# Altium PCB Operational_Amplifier.PcbDoc
Units mil, origin at the board's own origin, x right, y up, seen from the top; angles counter-clockwise.
Board outline 1165 x 1255 mil, 4 copper layers (Top Layer, Layer 1, Layer 2, Bottom Layer), stack 23.756 mil thick; 61 components, 59 nets, 168 pads, 37 vias.
Unrouted connection lines stored in the file: 39.
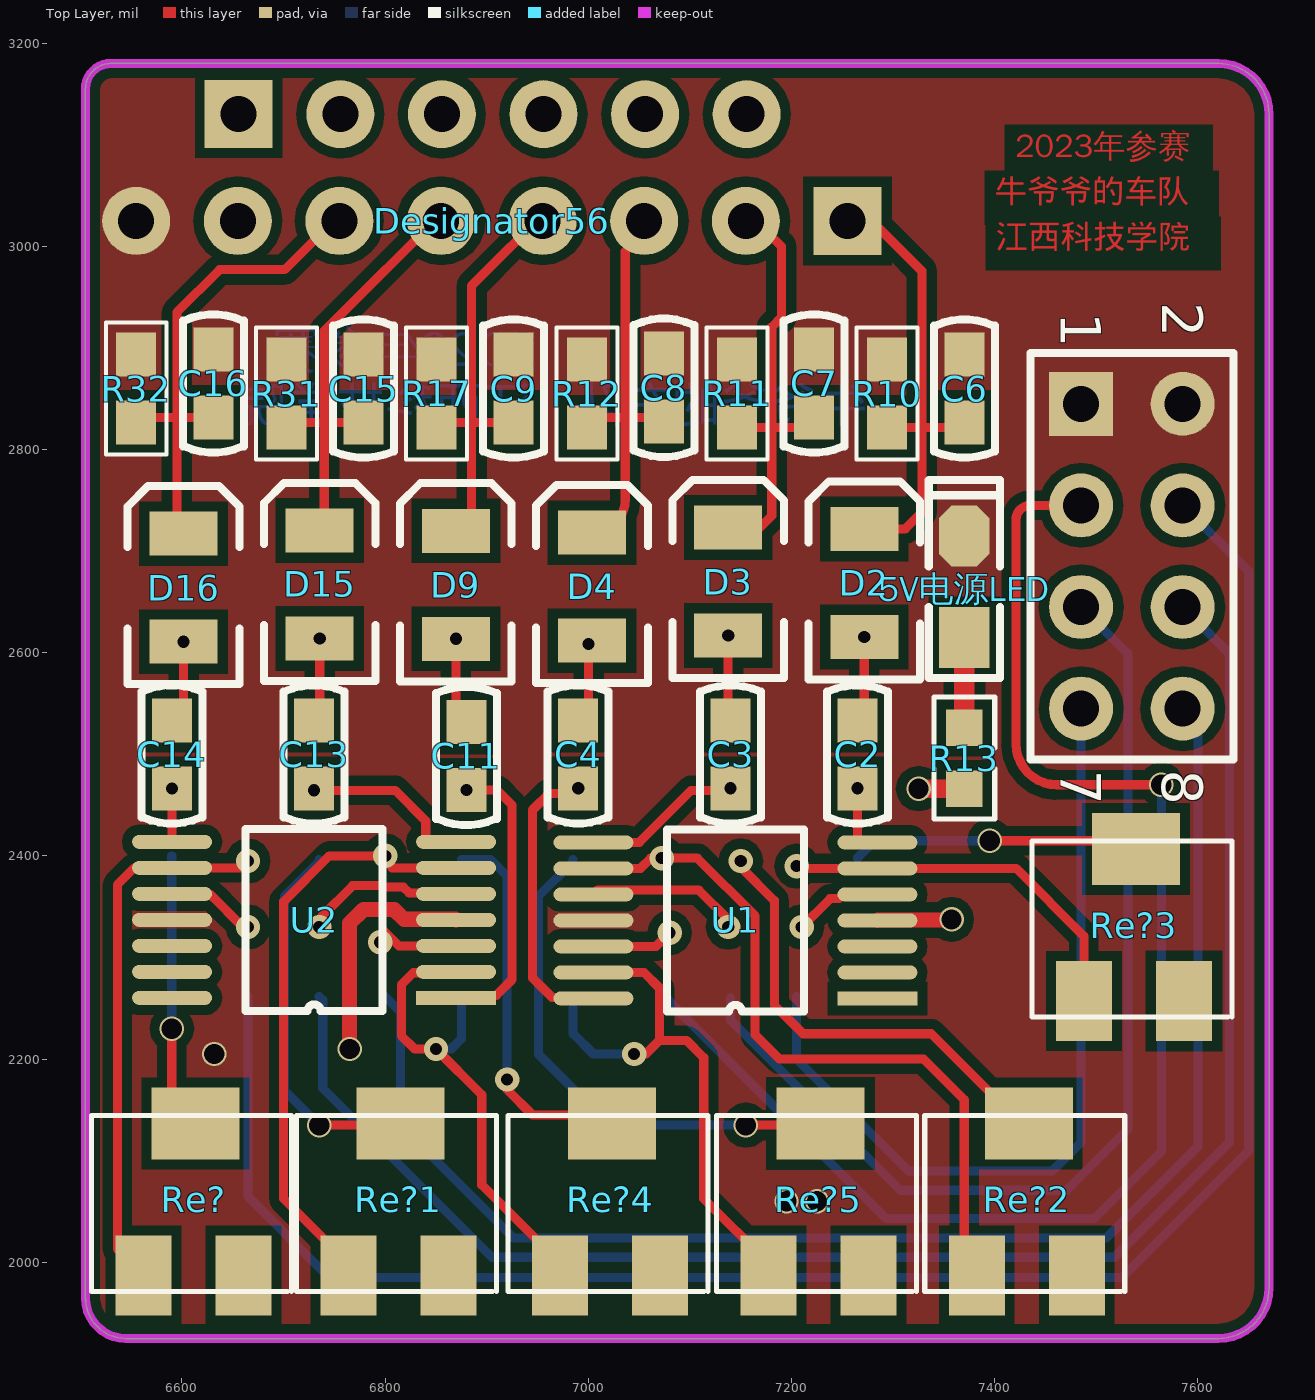
[diagram p0: Top Layer view]
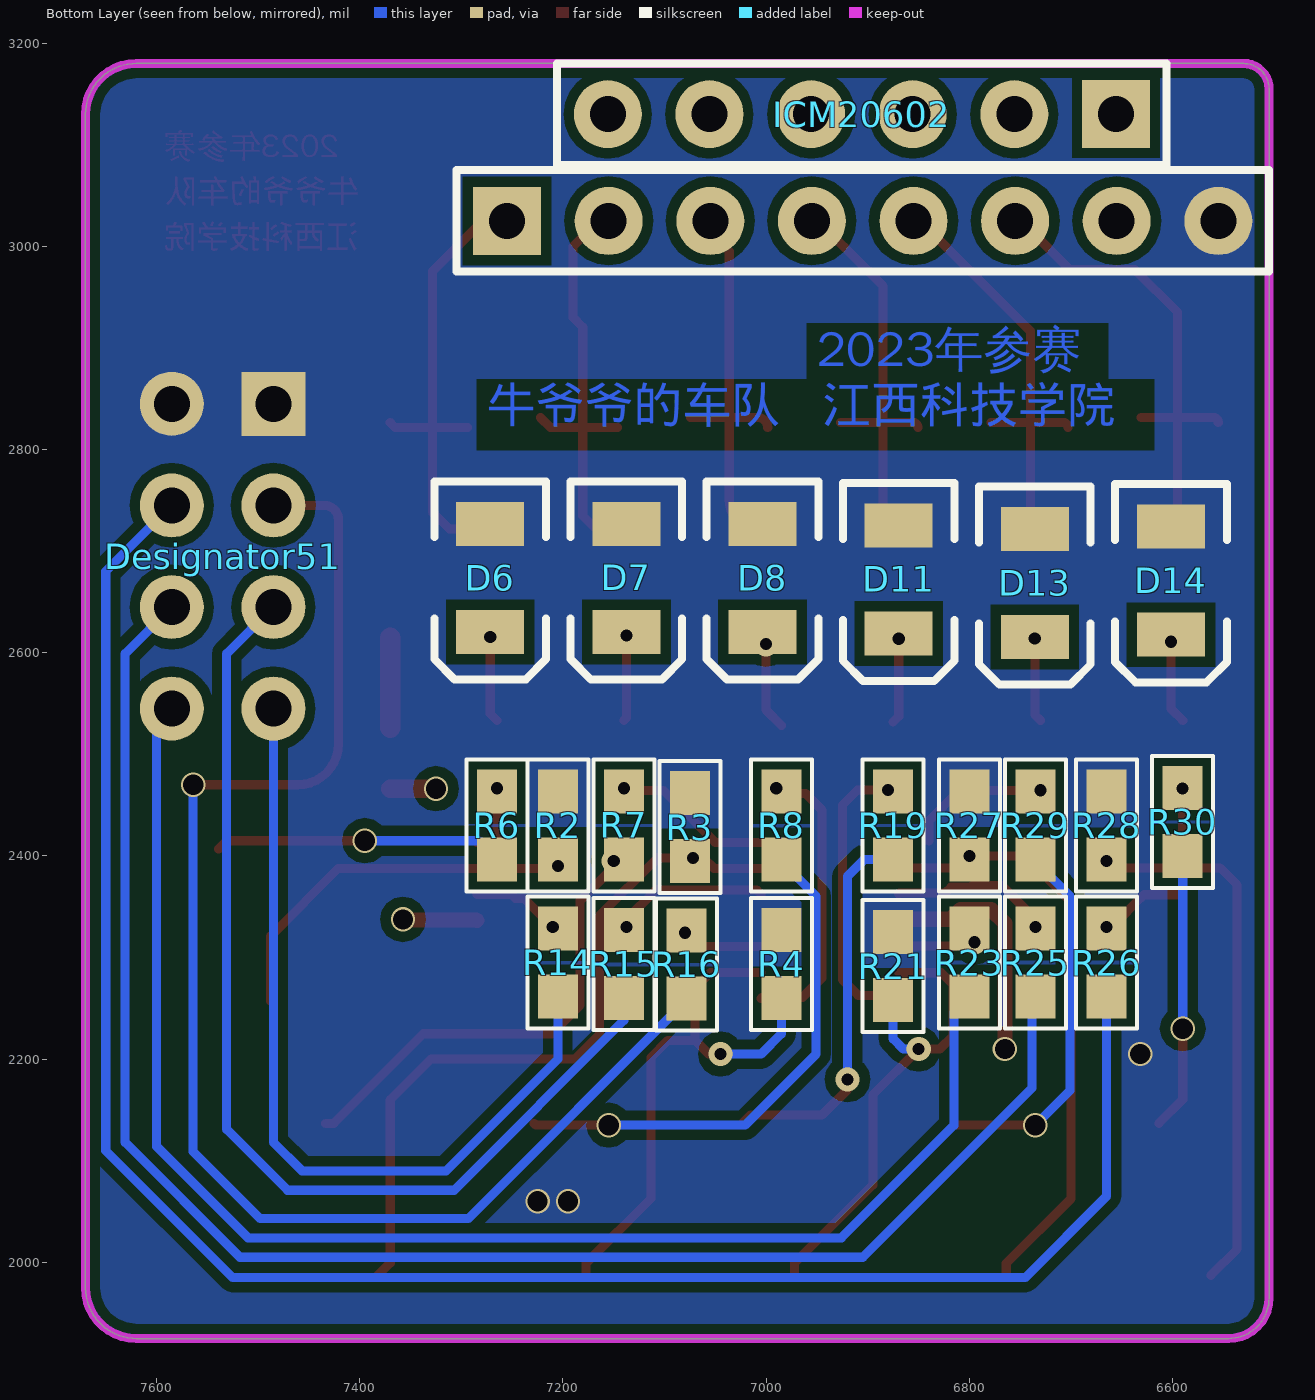
[diagram p1: Bottom Layer view, seen from below]
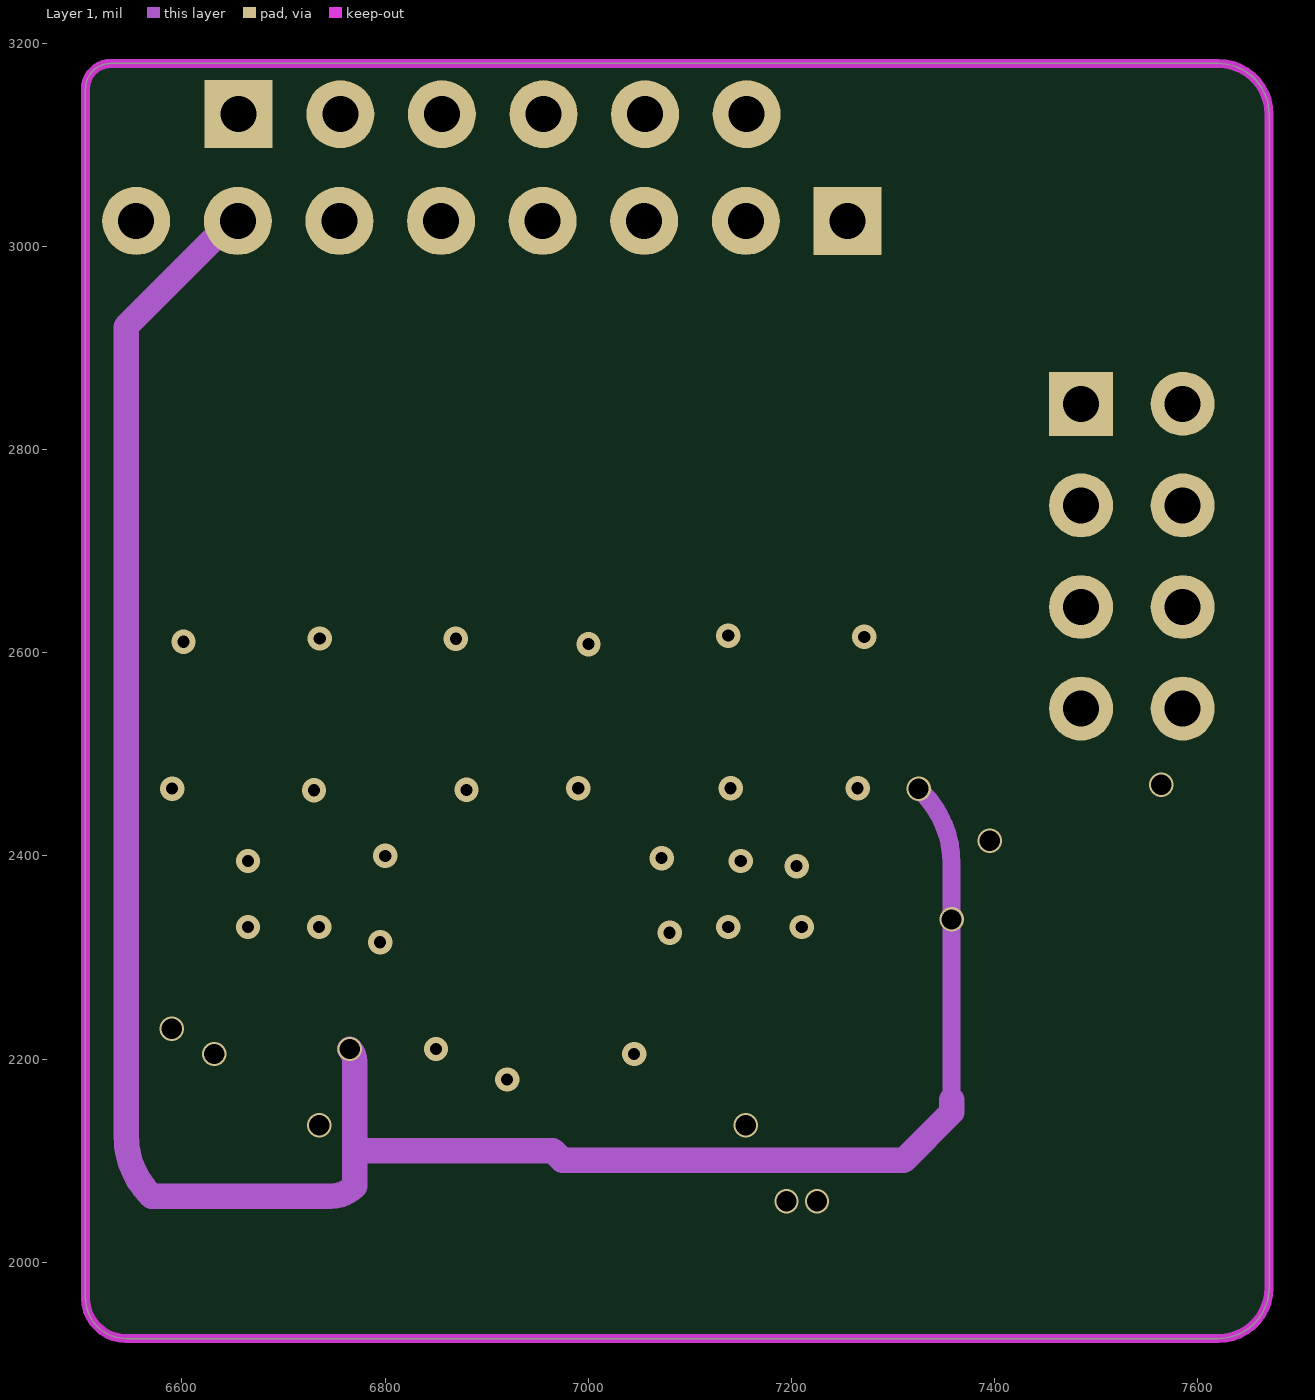
[diagram p2: Layer 1]
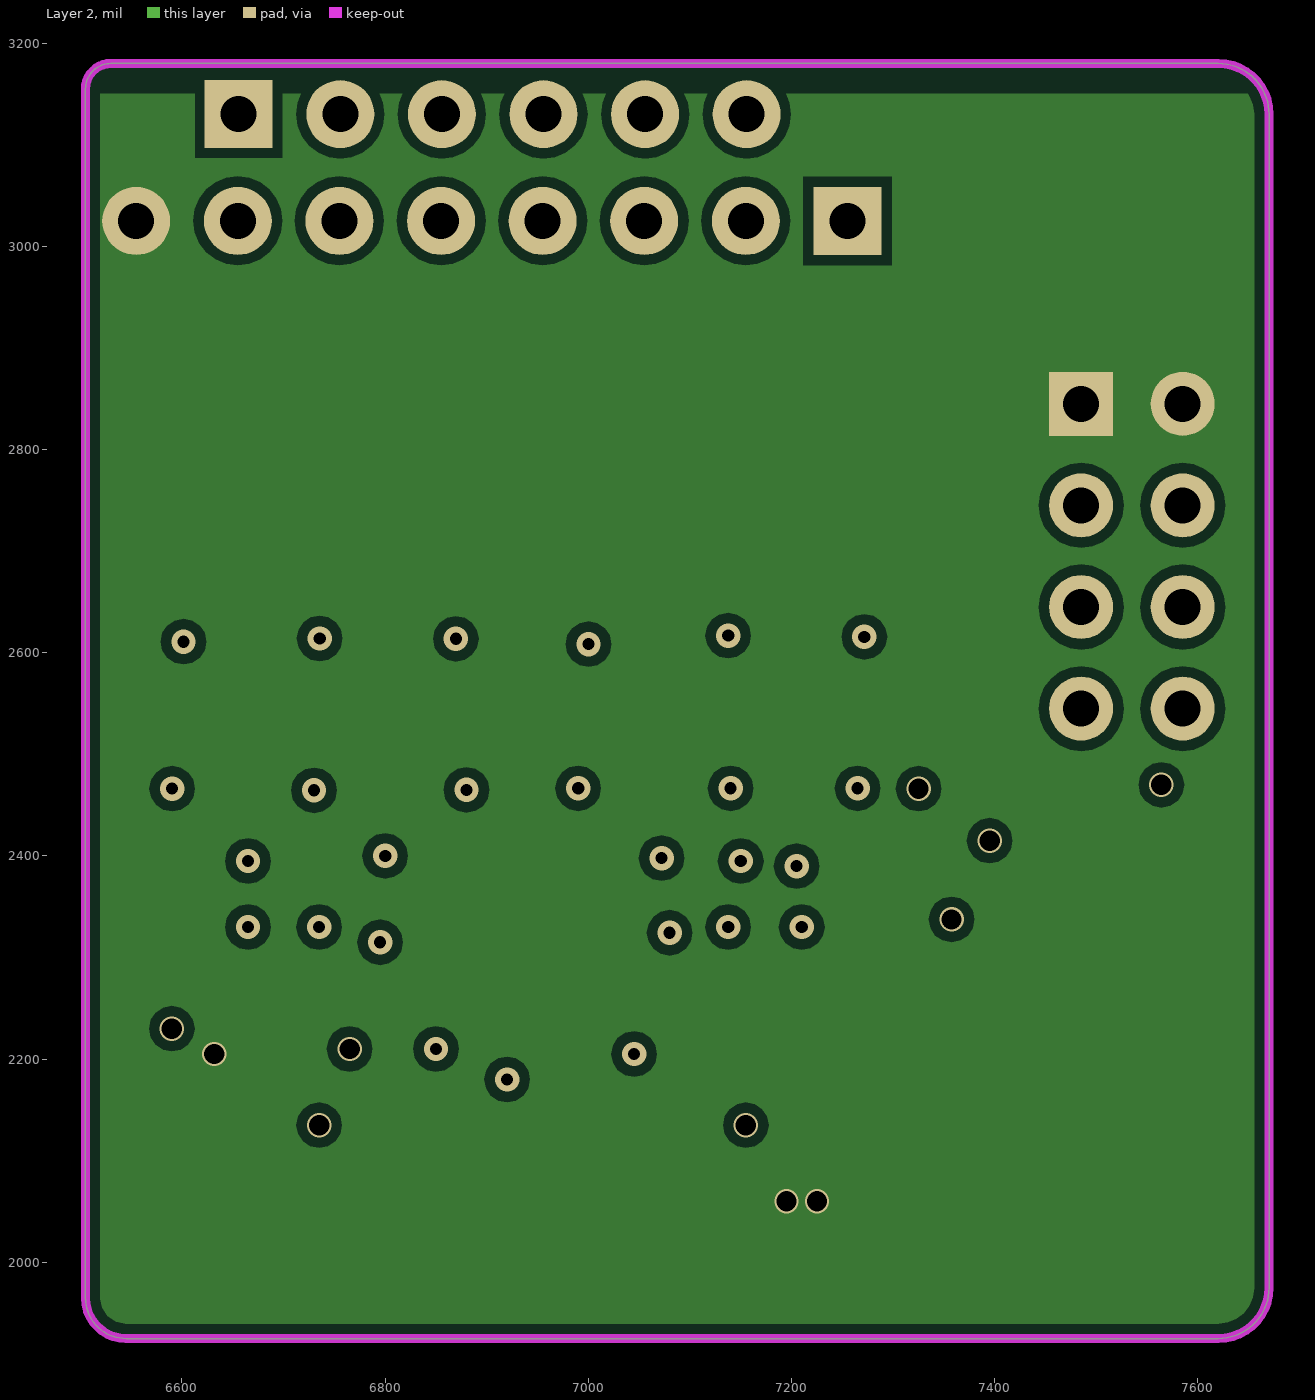
[diagram p3: Layer 2]

## Layer stack, top to bottom
Top Solder: solder mask 0.4, Solder Resist, Dk 3.5
Top Layer: signal copper 1.4
Dielectric 1: dielectric 12.6, FR-4, Dk 4.8
Layer 1: signal copper 1.3779
Dielectric 2: prepreg 2.8, PP-006, Dk 4.1
Layer 2: signal copper 1.3779
Dielectric 3: prepreg 2.8, PP-006, Dk 4.1
Bottom Layer: signal copper 1.4
Bottom Solder: solder mask 0.4, Solder Resist, Dk 3.5

## Board outline
6505,1965 6505,3155 cw(c6530,3155) 6530,3180 7620,3180 cw(c7620,3130) 7670,3130 7670,1975 cw(c7620,1975) 7620,1925 6545,1925 cw(c6545,1965)

## Design rules (kind name [scope] priority, off if disabled: settings)
Clearance [All] p1: gap=10 ignorepadtopadclearanceinfootprint=FALSE except(0: Arc-Hole Track-Hole SMDPad-Hole THPad-Hole Via-Hole Fill-Hole Poly-Hole Region-Hole Text-Hole)
ComponentClearance [All] p1: gap=6 collisioncheckmode=3 verticalgap=10 showdistances=FALSE
PolygonConnect [All] p1: connectstyle=Direct reliefconductorwidth=10 reliefentries=4 polygonreliefangle="90 Angle" airgapwidth=10
RoutingVias [All] p1: holewidth=28 width=50 viastyle="Through Hole" minholewidth=28 minwidth=50 maxholewidth=28 maxwidth=50
SolderMaskExpansion [All] p1: expansion=4
Width [All] p1: maxlimit=30 minlimit=8 preferedwidth=10
Width Width_1 [All] p2: maxlimit=9 minlimit=9 preferedwidth=9
29 further rules are at their usual default settings.

## Classes and differential pairs
net class NewClass: GND
component class Sheet1: C2 C3 C4 C6 C7 C8 C9 C11 C13 C14 C15 C16 D2 D3 D4 D6 D7 D8 D9 D11 D13 D14 D15 D16 R2 R3 R4 R6 R7 R8 R10 R11 R12 R14 R15 R16 R17 R19 R21 R23 R25 R26 R27 R28 R29 R30 R31 R32 U1 U2

## Components (designator, comment, footprint, x,y, rotation, side; value= is the part's Value field where it differs from the comment)
5V电源LED "LED5V" "LED 0805B" 7370,2665 r90 top
C2 "" C-RAD-0603 7265,2500 r90 top value=0.1uF
C3 "Cap" C-RAD-0603 7140,2500 r90 top value=0.1uF
C4 "" C-RAD-0603 6990,2500 r90 top value=0.1uF
C6 "Cap" C-RAD-0603 7370,2860 r270 top value=0.1uF
C7 "Cap" C-RAD-0603 7222.18,2865 r270 top value=0.1uF
C8 "Cap" C-RAD-0603 7074.35,2860.8 r270 top value=0.1uF
C9 "Cap" C-RAD-0603 6926.53,2860 r270 top value=0.1uF
C11 "Cap" C-RAD-0603 6880,2498.46 r90 top value=0.1uF
C13 "" C-RAD-0603 6730,2500 r90 top value=0.1uF
C14 "Cap" C-RAD-0603 6590,2500 r90 top value=0.1uF
C15 "Cap" C-RAD-0603 6778.7,2860 r270 top value=0.1uF
C16 "Cap" C-RAD-0603 6630.88,2865 r270 top value=0.1uF
D2 "1N5819" SOD-123 7271.61,2668.7 r270 top
D3 "1N5819" SOD-123 7137.6,2670 r270 top
D4 "1N5819" SOD-123 7003.59,2665 r270 top
D6 "1N5819" SOD-123 7271.61,2673.7 r90 bottom
D7 "1N5819" SOD-123 7137.6,2673.7 r90 bottom
D8 "1N5819" SOD-123 7003.59,2673.7 r90 bottom
D9 "1N5819" SOD-123 6869.57,2666.85 r270 top
D11 "1N5819" SOD-123 6869.57,2672.16 r90 bottom
D13 "1N5819" SOD-123 6735.56,2668.7 r90 bottom
D14 "1N5819" SOD-123 6601.55,2670.86 r90 bottom
D15 "1N5819" SOD-123 6735.56,2667.16 r270 top
D16 "1N5819" SOD-123 6601.55,2664.02 r270 top
Designator51 "Comment" HDR2.54-LI-2x4P 7535,2695 r270 bottom
Designator56 "Comment" HDR2.54-LI-8P 6905,3025 r180 top
ICM20602 "Header 6" HDR2.54-LI-6P 6905.81,3130 r0 bottom
R2 "4.7K" 0603-1 7205,2430 r270 bottom
R3 "4.7K" 0603-1 7075,2428.46 r270 bottom
R4 "4.7K" 0603-1 6985,2293.46 r270 bottom
R6 "4.7K" 0603-1 7265,2430 r90 bottom
R7 "4.7K" 0603-1 7140,2430 r90 bottom
R8 "4.7K" 0603-1 6985,2430 r90 bottom
R10 "4.7K" 0603-1 7294.12,2855 r270 top
R11 "4.7K" 0603-1 7146.3,2855 r90 top
R12 "4.7K" 0603-1 6998.47,2855 r90 top
R13 "Res1" R-0603 7370,2496.22 r270 top value=1K (schematic designator R10)
R14 "4.7K" 0603-1 7205,2295 r90 bottom
R15 "4.7K" 0603-1 7140,2293.46 r90 bottom
R16 "4.7K" 0603-1 7078.39,2293.23 r90 bottom
R17 "4.7K" 0603-1 6850.65,2855 r270 top
R19 "4.7K" 0603-1 6875,2430 r90 bottom
R21 "4.7K" 0603-1 6875,2291.54 r270 bottom
R23 "4.7K" 0603-1 6800,2295 r90 bottom
R25 "4.7K" 0603-1 6735,2295 r90 bottom
R26 "4.7K" 0603-1 6665,2295 r90 bottom
R27 "4.7K" 0603-1 6800,2430 r270 bottom
R28 "4.7K" 0603-1 6665,2430 r270 bottom
R29 "4.7K" 0603-1 6735,2430 r90 bottom
R30 "4.7K" 0603-1 6590,2433.46 r90 bottom
R31 "4.7K" 0603-1 6702.82,2855 r270 top
R32 "4.7K" 0603-1 6555,2860 r90 top
Re? "3224W" 3224W 6609.53,2060 r90 top
Re?1 "3224W" 3224W 6810.97,2060 r90 top (schematic designator Re?)
Re?2 "3224W" 3224W 7429.53,2060 r90 top (schematic designator Re?)
Re?3 "3224W" 3224W 7535,2330 r90 top (schematic designator Re?)
Re?4 "3224W" 3224W 7019.53,2060 r90 top (schematic designator Re?)
Re?5 "3224W" 3224W 7224.53,2060 r90 top (schematic designator Re?)
U1 "OPA4377" OPA4377 7274.68,2279.45 r180 top locked
U2 "OPA4377" OPA4377 6860,2280 r180 top locked

## Footprints (in the part's own frame and the unit in brackets; to place one, negate y for a bottom-side part, rotate by r counter-clockwise, add the part's x,y. Pads: shape width x height; smd on the part's side, far side on the other; paste and mask are expansions set on the pad)
0603-1 [mm] "贴片带丝印"
  rect 1.1x1 smd: 1(-0.85,0) 2(0.85,0)
  silkscreen extent -1.65,-0.76 1.65,0.76, body extent -1.14,-0.38 1.14,0.38, height 1
3224W [mm]
  rect 2x1.4 smd: 1(-1.85,1.2) 3(-1.85,-1.3)
  rect 1.8x2.2 smd: 2(1.95,-0.1)
  silkscreen extent -2.25,-2.5 2.15,2.5
C-RAD-0603 [mm] "贴片电容"
  rect 1.1x1 smd: 1(-0.85,0) 2(0.85,0)
  silkscreen extent -1.73,-0.76 1.73,0.76, body extent -1.14,-0.38 1.14,0.38, height 1
HDR2.54-LI-2x4P [mm] "双排排针，4x2脚"
  rect 1.6x1.6 hole 0.9: 1(-3.81,1.27)
  round 1.6 hole 0.9: 2(-3.81,-1.27) 3(-1.27,1.27) 4(-1.27,-1.27) 5(1.27,1.27) 6(1.27,-1.27) 7(3.81,1.27) 8(3.81,-1.27)
  body extent -5.08,-2.54 5.08,2.54, height 8.5
HDR2.54-LI-6P [mm] "排针，6脚"
  rect 1.7x1.7 hole 0.9: 1(-6.35,0)
  round 1.7 hole 0.9: 2(-3.81,0) 3(-1.27,0) 4(1.27,0) 5(3.81,0) 6(6.35,0)
  silkscreen extent -7.62,-1.27 7.62,1.27, body extent -7.62,-1.27 7.62,1.27, height 8.5
HDR2.54-LI-8P [mm] "排针，8脚"
  rect 1.7x1.7 hole 0.9: 1(-8.89,0)
  round 1.7 hole 0.9: 2(-6.35,0) 3(-3.81,0) 4(-1.27,0) 5(1.27,0) 6(3.81,0) 7(6.35,0) 8(8.89,0)
  body extent -10.16,-1.27 10.16,1.27, height 8.5
"LED 0805B" [mil] "蓝色0805LED                                    淘宝ID:黄晶宝石"
  rect 60x50 smd: 1(-50,0)
  oct 60x50 smd: 2(50,0)
  silkscreen extent -90,-35 105,35, body extent -39,-25 39,25, height 32
OPA4377 [mm]
  rect 2x0.35 smd: 1(-0.25,0.5)
  oval 2x0.35 smd: 2(-0.25,-0.15) 3(-0.25,-0.8) 4(-0.25,-1.45) 5(-0.25,-2.1) 6(-0.25,-2.75) 7(-0.25,-3.4) 8(6.85,-3.4) 9(6.85,-2.75) 10(6.85,-2.1) 11(6.85,-1.45) 12(6.85,-0.8) 13(6.85,-0.15) 14(6.85,0.5)
  silkscreen extent 1.58,-3.72 5.01,0.83
R-0603 [mil]
  rect 36x36 smd: 1(-30,0) 2(30,0)
  silkscreen extent -60,-30 60,30, body extent -31,-16 31,16, height 18
SOD-123 [mm] "Surface mounted, 2 pin package"
  rect 1.1x1.7 smd: 1(1.35,0) 2(-1.35,0)
  silkscreen extent -2.54,-1.4 2.41,1.4, body extent -1.65,-0.8 1.65,0.8, height 1.2

## Part data
5V电源LED: library part LED2, "Typical RED, GREEN, YELLOW, AMBER GaAs LED", LatestRevisionDate=17-Jul-2002, LatestRevisionNote="Re-released for DXP Platform.", PackageDescription="SM LED; 2 Flat Leads", PackageReference=3.2X1.6X1.1, PackageVersion=Feb-2002, Published=8-Jun-2000, Publisher="Altium Limited"
C2 C4 C13: library part Cap, "Capacitor", LatestRevisionDate=17-Jul-2002, LatestRevisionNote="Re-released for DXP Platform.", PackageDescription="Radial Cap, Thru-Hole; 2 Leads; 0.3 in Pin Spacing", PackageReference=RAD-0.3, Published=8-Jun-2000, Publisher="Altium Limited"
C3 C6 C7 C8 C9 C11 C14 C15 C16: "Capacitor", LatestRevisionDate=17-Jul-2002, LatestRevisionNote="Re-released for DXP Platform.", PackageDescription="Radial Cap, Thru-Hole; 2 Leads; 0.3 in Pin Spacing", PackageReference=RAD-0.3, Published=8-Jun-2000, Publisher="Altium Limited"
D2 D3 D4 D6 D7 D8 D9 D11 D13 D14 D15 D16: library part "Diode 1N5404", "3 Amp General Purpose Rectifier", ComponentLink1Description="Manufacturer Link", ComponentLink1URL=http://www.fairchildsemi.com/, ComponentLink2Description=Datasheet, ComponentLink2URL=http://www.fairchildsemi.com/ds/1N%2F1N5400.pdf, DatasheetVersion=1998, LatestRevisionDate=17-Jul-2002, LatestRevisionNote="Re-released for DXP Platform.", PackageDescription="Diode, Axial; Body 9.5 x 5.6 mm (LxDia. max), Lead Dia. 1.32 mm (max)", PackageReference=DO-201AD, PackageVersion=Aug-1999, Published=8-Jun-2000, Publisher="Altium Limited"
ICM20602: "Header, 6-Pin", LatestRevisionDate=17-Jul-2002, LatestRevisionNote="Re-released for DXP Platform.", Publisher="Altium Limited"
R2 R3 R4 R6 R7 R8 R10 R11 R12 R14 R15 R16 R17 R19 R21 R23 R25 R26 R27 R28 R29 R30 R31 R32: library part RES
R13: "Resistor", LatestRevisionDate=17-Jul-2002, LatestRevisionNote="Re-released for DXP Platform.", PackageDescription="Axial Device, Thru-Hole; 2 Leads; 0.3 in Pin Spacing", PackageReference=AXIAL-0.3, Published=8-Jun-2000, Publisher="Altium Limited"
U1 U2: library part OPA4377_1, Contributor=sssssxw, spicePre=U, spiceSymbolName=OPA4377

## Via types
v1: diameter 24, hole 12, Top Layer to Bottom Layer, tented both sides, 26 vias
v2: diameter 24, hole 20, Top Layer to Bottom Layer, tented both sides, 11 vias

## Nets (pads, with @x,y where several pads share a name; then routed paths per layer and width w, separated by ;. In a path a pad name is that pad's centre, name@x,y a point inside that pad or via, vN(x,y) a via of type N, cw(c..) or ccw(c..) an arc to the next point about the centre after c; other vN are vias at no path point)
3.3V: 
GND: 5V电源LED.2 C6.1 C7.1 C8.1 C9.1 C15.1 C16.1 D6.1 D7.1 D8.1 D11.1 D13.1 D14.1 Designator51.1 Designator51.2 Designator56.8 R2.1 R3.1 R4.1 R10.1 R11.2 R12.2 R17.1 R21.1 R27.1 R28.1 R31.1 R32.2 U1.11 U2.11
  other v2: 7195,2060 7225,2060 6631.66,2205
IN1: 
IN2: Designator51.7 R14.1 | length 839.8
  Bottom Layer w9: R14.1 7205,2200 7315,2090 7456.87,2090 7485,2118.13 Designator51.7 Designator51.7@7475,2535
IN3: Designator51.5 R15.1 | length 1068.9
  Top Layer w9: Designator51.5 7491.27,2638.73 Designator51.5@7511.27,2638.73
  Bottom Layer w9: R15.1 7140,2238.13 7307.13,2071 7471,2071 7531,2131 7531,2599 Designator51.5
IN4: Designator51.3 R16.1 | length 1422.4
  Top Layer w9: Designator51.3 7435,2745 ccw(c7435,2731) 7421,2731 7421,2510 ccw(c7461,2510) 7461,2470 v2(7564,2470)
  Bottom Layer w9: R16.1 7078.39,2257.8 7293.19,2043 7498,2043 7564,2109 7564,2460.22 v2@7570,2466.22
IN5: Designator51.8 R23.1 | length 1438.2
  Bottom Layer w9: R23.1 6815.19,2246.35 6815.19,2134.82 6926,2024 7510,2024 7600,2114 7600,2530 Designator51.8
IN6: Designator51.6 R25.1 | length 1645.7
  Bottom Layer w9: R25.1 6738.5,2258.04 6738.5,2171.5 6905,2005 7517.87,2005 7631,2118.13 7631,2599 Designator51.6
IN7: Designator51.4 R26.1 | length 1928.4
  Bottom Layer w9: R26.1 6665,2065 6745,1985 7525,1985 7650,2110 7650,2680 Designator51.4
IN8: 
NetC1_1: U1.1
NetC1_2: 
NetC2_1: C2.1 R6.2 U1.7 | length 72.8
  Top Layer w9: v1(7265,2466.54) 7265,2413.31 U1.7
NetC2_2: C2.2 D2.1 D6.2 | length 84.8
  Top Layer w9: C2.2 7271.61,2540.07 v1(7271.61,2615.55)
NetC3_1: C3.1 R7.2 U1.8 | length 158.2
  Top Layer w9: U1.8 7050.05,2413.31 7101.31,2464.57 7140,2464.57 v1(7140,2466.54)
NetC3_2: C3.2 D3.1 D7.2 | length 84.4
  Top Layer w9: v1(7137.6,2616.85) 7137.6,2535.87 C3.2
NetC4_1: C4.1 R8.2 U1.14 | length 280.4
  Top Layer w9: C4.1@6985,2461.54 6961.31,2461.54 6945,2445.22 6945,2280 6964.32,2260.68 7004.09,2260.68 U1.14
  other v1: 6990,2466.54
NetC4_2: C4.2 D4.1 D8.2 | length 91.1
  Top Layer w9: C4.2@6985,2528.46 7000.19,2543.65 v1(7000.19,2608.45) D4.1
NetC11_1: C11.1 R19.2 U2.1 | length 290.5
  Top Layer w9: U2.1 6872.23,2262.7 6909.37,2262.7 6925,2278.33 6925,2450 6910,2465 C11.1@6875,2465
  other v1: 6880,2465
NetC11_2: C11.2 D9.1 D11.2 | length 84
  Top Layer w9: v1(6869.57,2613.7) 6869.57,2537.35 C11.2@6875,2531.93
NetC12_1: U2.14
NetC12_2: 
NetC13_1: C13.1 R29.2 U2.7 | length 143.9
  Top Layer w9: C13.1 v1(6730,2464.57) 6809.81,2464.57 6840,2434.38 U2.7@6840,2415
NetC13_2: C13.2 D13.2 D15.1 | length 82.9
  Top Layer w9: C13.2 6735.56,2539.03 v1(6735.56,2614.01)
NetC14_1: C14.1 R30.2 U2.8 | length 52.8
  Top Layer w9: C14.1 v1(6590.32,2466.22) U2.8
NetC14_2: C14.2 D14.2 D16.1 | length 82.2
  Top Layer w9: C14.2 6601.55,2545.02 v1(6601.55,2610.87)
NetR1_2: U1.2
NetR2_2: R2.2 Re?3.1 U1.6 | length 377.2
  Top Layer w9: v1@7205,2395 7212.28,2387.72 7421,2387.72 7487.76,2320.96 Re?3.1
  other v1: 7205,2390
NetR3_2: R3.2 Re?2.1 U1.9 | length 714.1
  Top Layer w9: U1.9 7051.33,2387.72 7061.46,2397.85 v1(7072.07,2397.85) 7107.23,2397.85 7164.1,2340.98 7164.1,2224.1 7188.2,2200 7330,2200 7370,2160 7370,1999.45 Re?2.1
NetR4_2: R4.2 Re?5.1 U1.13 | length 548
  Top Layer w9: U1.13 7054.64,2285.36 7070,2270 7070,2218.41 ; v1(7045,2205) 7056.59,2205 7070,2218.41 ; Re?5.1 7177.28,1998.98 7113.5,2062.76 7113.5,2201.5 7096.59,2218.41 7070,2218.41
  Bottom Layer w9: R4.2 6985,2225 7005,2205 v1(7045,2205)
NetR5_1: 
NetR6_1: R6.1 Re?3.2 | length 286.1
  Top Layer w9: v2(7395,2415) 7530.71,2415 Re?3.2
  Bottom Layer w9: R6.1 7265,2398.5 7280.19,2413.69 7282.15,2413.69 7283.46,2415 v2(7395,2415)
NetR7_1: R7.1 Re?2.2 | length 454.1
  Top Layer w9: v1(7150,2395) 7150,2389.06 7183.1,2355.96 7183.1,2253.18 7211.27,2225 7337.36,2225 7425.59,2136.77 Re?2.2
NetR8_1: R8.1 Re?5.2 | length 513.1
  Top Layer w9: v2(7155,2135) 7226.7,2135 Re?5.2
  Bottom Layer w9: R8.1 6985,2394.57 6950.81,2360.38 6950.81,2205 7020.81,2135 v2(7155,2135)
NetR13_2: U1.3
NetR14_2: R14.2 U1.5 | length 87.8
  Top Layer w9: v1(7210,2330) 7237.93,2357.93 7246.55,2357.93 7250.75,2362.13 U1.5
NetR15_2: R15.2 U1.10 | length 153.7
  Top Layer w9: U1.10 7009.2,2366.33 7108.67,2366.33 7137.6,2337.4 v1(7137.6,2330)
NetR16_2: R16.2 U1.12 | length 80.6
  Top Layer w9: U1.12 7066.59,2310.95 v1(7080,2324.36)
NetR19_1: R19.1 Re?4.2 | length 379.1
  Top Layer w9: v1(6920,2180) 6920,2170 6945,2145 7015.23,2145 Re?4.2
  Bottom Layer w9: R19.1 6903.46,2396.54 6920,2380 v1(6920,2180)
NetR20_1: 
NetR21_2: R21.2 Re?4.1 U2.2 | length 489.4
  Top Layer w9: U2.2 6868.93,2284.99 6827.75,2284.99 6815.97,2273.21 6815.97,2223.12 6829.1,2210 v1(6850,2210) 6895,2165 6895,2076.26 6972.28,1998.98 Re?4.1
  Bottom Layer w9: v1(6850,2210) 6865,2210 6875,2220 R21.2
NetR22_2: U2.13
NetR23_2: R23.2 U2.3 | length 75.4
  Top Layer w9: v1@6800,2325 6813.51,2311.49 U2.3
  other v1: 6795,2315
NetR24_2: U2.12
NetR25_2: R25.2 U2.5 | length 159.7
  Top Layer w9: v1(6735,2330) 6737.87,2332.87 6737.87,2340.7 6767.94,2370.77 6797.36,2370.77 6798.86,2369.27 6817.96,2369.27 6823.63,2363.59 6868.93,2363.59 U2.5
NetR26_2: R26.2 U2.10 | length 90.4
  Top Layer w9: U2.10 6591.23,2361.76 6628.24,2361.76 6631.53,2358.47 6631.66,2358.47 6644.19,2345.94 6644.19,2345.81 v1@6665,2325
  other v1: 6665,2330
NetR27_2: R27.2 Re?1.1 U2.6 | length 590.5
  Top Layer w9: Re?1.1 6763.73,1998.98 6700,2062.71 6700,2355 6745,2400 v1(6800,2400) 6800,2395.94 6806.73,2389.21 6806.73,2388.27 U2.6
NetR28_2: R28.2 Re?.1 U2.9 | length 533.3
  Top Layer w9: Re?.1 6536.45,2013.01 6536.45,2371.54 6553.18,2388.27 U2.9 6658.27,2388.27 v1(6665,2395)
NetR29_1: R29.1 Re?1.2 | length 370.5
  Top Layer w9: v2(6735,2135) 6813.14,2135 Re?1.2
  Bottom Layer w9: v2(6735,2135) 6700.81,2169.18 6700.81,2360.38 6735,2394.57 R29.1
NetR30_1: R30.1 Re?.2 | length 273
  Top Layer w9: v2(6590,2230) 6590,2160.23 Re?.2
  Bottom Layer w9: v2(6590,2230) R30.1
OUT1: 
OUT2: C6.2 D2.2 Designator56.1 R10.2 | length 469.8
  Top Layer w9: Designator56.1@7263.96,3040 7328.3,2975.66 7328.3,2821.54 ; D2.2 7311.85,2721.85 7328.3,2738.3 7328.3,2821.54 ; R10.2 7328.3,2821.54 ; C6.2 7365,2821.54 7328.3,2821.54
OUT3: C7.2 D3.2 Designator56.2 R11.1 | length 447.5
  Top Layer w9: D3.2 7168.63,2723.15 7180.48,2735 7180.48,2821.54 ; R11.1 7180.48,2821.54 ; Designator56.2@7163.96,3040 7163.96,3026.04 7190,3000 7190,2930 7180.48,2920.48 7180.48,2821.54 ; C7.2 7212.18,2821.54 7180.48,2821.54
OUT4: C8.2 D4.2 Designator56.3 R12.1 | length 433.6
  Top Layer w9: R12.1 cw(c7008.47,2821.54) 7008.47,2831.54 7036.33,2831.54 ; D4.2@7003.59,2718.15 ccw(c7003.59,2750.9) 7036.33,2750.9 7036.33,2831.54 ; Designator56.3@7063.96,3040 7063.96,3022.63 7036.33,2995 7036.33,2831.54 ; C8.2@7074.35,2831.54 7036.33,2831.54
OUT5: C9.2 D9.2 Designator56.4 R17.2 | length 440.2
  Top Layer w9: R17.2 cw(c6855.65,2821.54) 6855.65,2826.54 6885,2826.54 ; D9.2 ccw(c6869.57,2735.42) 6885,2735.42 6885,2826.54 ; C9.2 6885,2826.54 ; Designator56.4@6963.96,3040 6885,2961.04 6885,2826.54
OUT6: 5V电源LED.1 C15.2 D15.2 Designator56.5 R13.1 R31.2 | length 541.4
  Top Layer w9: R31.2 cw(c6707.82,2821.54) 6707.82,2826.54 6740,2826.54 ; D15.2 ccw(c6735.56,2724.75) 6740,2724.75 6740,2826.54 ; C15.2 6740,2826.54 ; Designator56.5@6863.96,3040 6863.4,3040 6740,2916.6 6740,2826.54
  Top Layer w20: R13.1 5V电源LED.1
OUT7: C16.2 D16.2 Designator56.6 R32.1 | length 512.8
  Top Layer w9: R32.1 cw(c6560,2826.54) 6560,2831.54 6595,2831.54 ; D16.2 cw(c6601.55,2723.72) 6595,2723.72 6595,2831.54 ; C16.2 6595,2831.54 ; Designator56.6@6763.96,3040 6701,2977.04 6637.04,2977.04 6595,2935 6595,2831.54
OUT8: 
VCC: Designator56.7 R13.2 U1.4 U2.4 | length 2666.1
  Top Layer w15: v2(6765,2210) 6765,2333.72 6778.55,2347.27 6808.85,2347.27 6818.42,2337.7 6869.23,2337.7 U2.4 ; U1.4 7285.01,2337.02 7355.69,2337.02 v2@7356.35,2336.35
  Top Layer w18: v2(7325,2466.22) R13.2 ; v2@7356.35,2336.35 v2(7357.5,2337.5)
  Layer 1 w18: v2(7325,2466.22) 7328.21,2463.01 cw(c7257.5,2392.3) 7357.5,2392.3 v2(7357.5,2337.5) 7357.5,2160
  Layer 1 w25: Designator56.7@6663.96,3040 6545,2921.04 6545,2125.36 ccw(c6630.36,2125.36) 6570,2065 6745.86,2065 ccw(c6745.86,2099.14) 6770,2075 6770,2110 ; v2(6765,2210) cw(c6752.93,2197.93) 6770,2197.93 6770,2110 ; 7357.5,2160 7357.5,2147.5 7310.5,2100.5 6974.4,2100.5 6964.9,2110 6770,2110
pads on no net: ICM20602.1 ICM20602.2 ICM20602.3 ICM20602.4 ICM20602.5 ICM20602.6 Re?1.3 Re?2.3 Re?3.3 Re?4.3 Re?5.3 Re?.3

## Polygon pours and split planes (outlines as drawn)
GND on Layer 2 "GND" (solid, remove dead copper, pour order 12): 6435,3135 cw(c6450,3135) 6450,3150 7995,3150 ccw(c7995,3125) 7970,3125 7970,1900 cw(c7925,1900) 7925,1855 6390,1855 cw(c6390,1945) 6300,1945 6300,3070
GND on Top Layer "GND" (solid, remove dead copper, pour order 14): 6315,3135 cw(c6360,3135) 6360,3180 8125,3180 cw(c8125,3145) 8160,3145 8160,1830 cw(c8060,1830) 8060,1730 6335,1730 cw(c6335,1830) 6235,1830 6235,3105 cw(c6280,3105) 6280,3150
GND on Bottom Layer "GND" (solid, remove dead copper, pour order 16): 6365,3220 8280,3220 cw(c8280,3120) 8380,3120 8380,2124 cw(c8280,2124) 8280,2024 7945,2024 cw(c7945,1924) 8045,1924 8045,1825 cw(c7945,1825) 7945,1725 6055,1725 cw(c6055,1825) 5955,1825 5955,2280

## Keep-outs
Keep-Out Layer:
  lines w9: 6505,1965 ccw(c6545,1965) 6545,1925 7620,1925 ccw(c7620,1975) 7670,1975 7670,3130 ccw(c7620,3130) 7620,3180 7615,3180 6530,3180 ccw(c6530,3155) 6505,3155 6505,3045 6505,1965

## Other copper
Top Layer:
  text "2023年参赛" at 7420,3080 h40
  text "牛爷爷的车队" at 7400,3035 h40
  text "江西科技学院" at 7401,2990 h40
Bottom Layer:
  text "2023年参赛" at 6950,2870 h60
  text "江西科技学院" at 6945,2815 h60
  text "牛爷爷的车队" at 7275,2815 h60

## Silkscreen, mask and mechanical layers (free items; w line width, h text height)
Top Solder:
  rectangle: 7365,2945 7650,3140
Bottom Solder:
  rectangle: 6580,2810 7305,2920
Mechanical 15:
  lines w0.1: 6556.82,1722.51 6556.84,1722.53

## Text inside footprints (layer, text, board x,y; h text height)
Designator51: Top Overlay "8" at 7565,2485 h40 r270; Top Overlay "1" at 7465,2935 h40 r270; Top Overlay "2" at 7565,2945 h40 r270; Top Overlay "7" at 7465,2485 h40 r270